# Altium PCB PT100.PcbDoc
Units mm, origin at the board's own origin, x right, y up, seen from the top; angles counter-clockwise.
Board outline 60 x 39 mm, 2 copper layers (Top Layer, Bottom Layer), stack 1.595 mm thick; 73 components, 43 nets, 258 pads, 51 vias.
Unrouted connection lines stored in the file: 1.
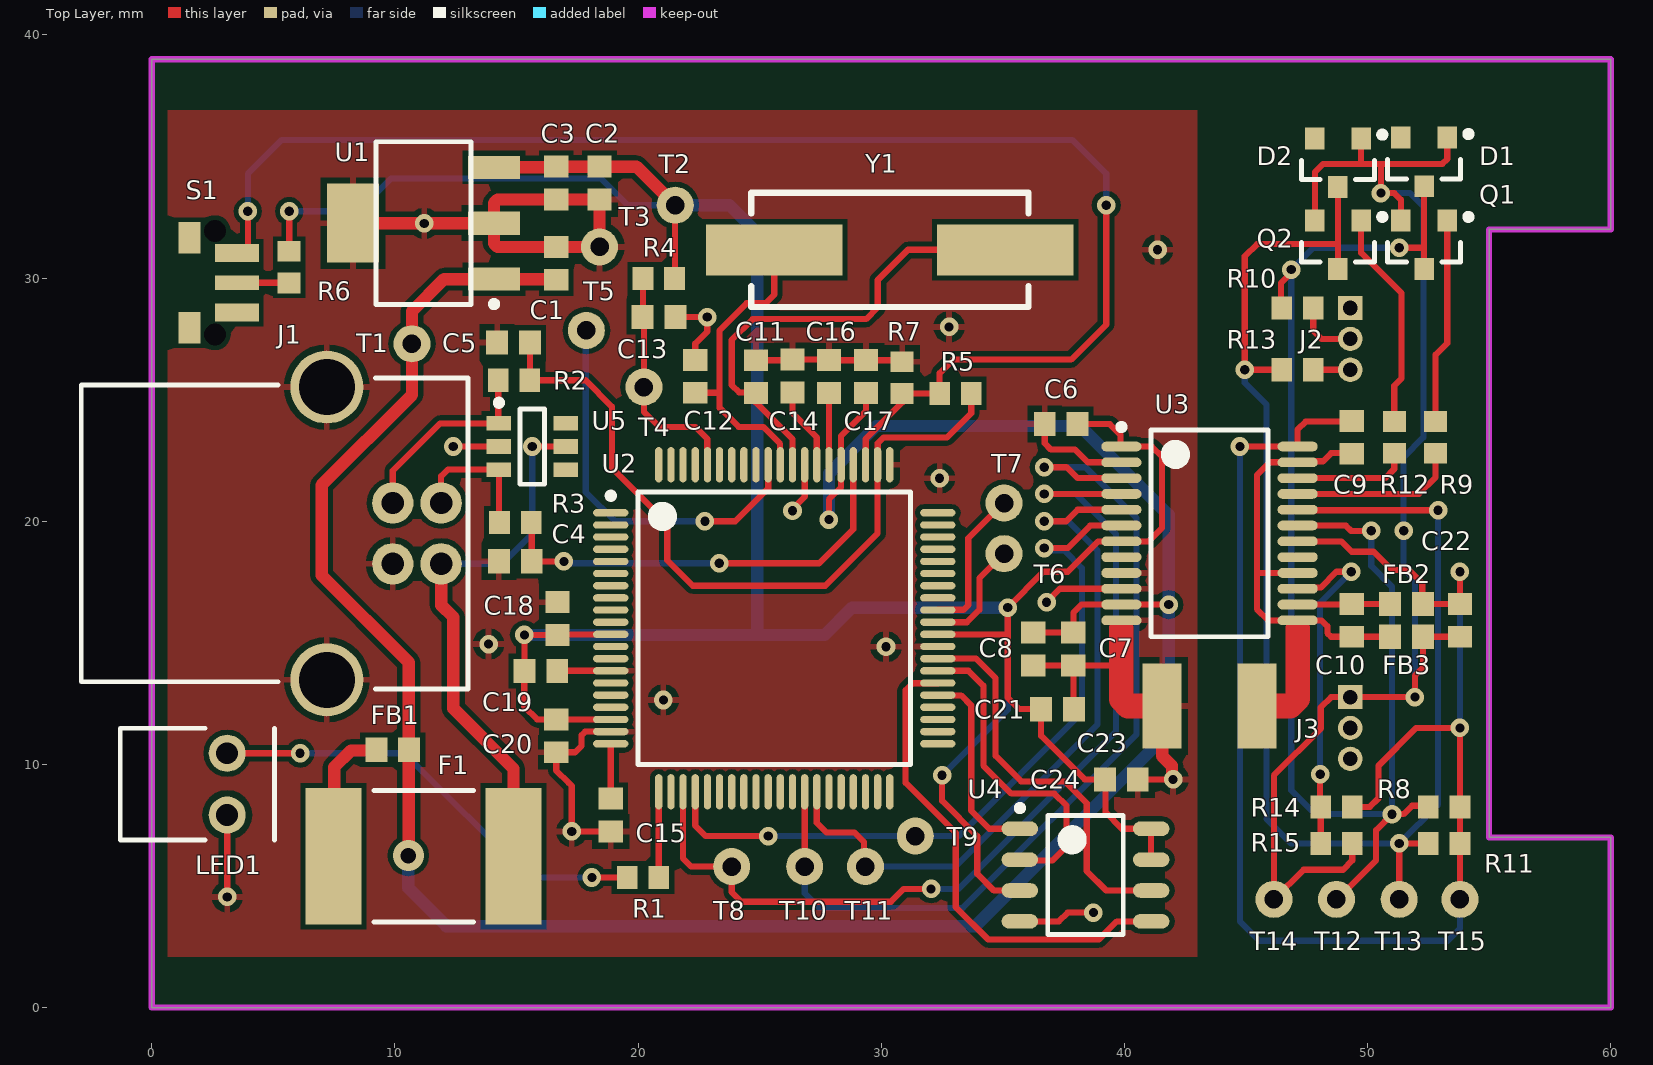
[diagram p0: Top Layer view]
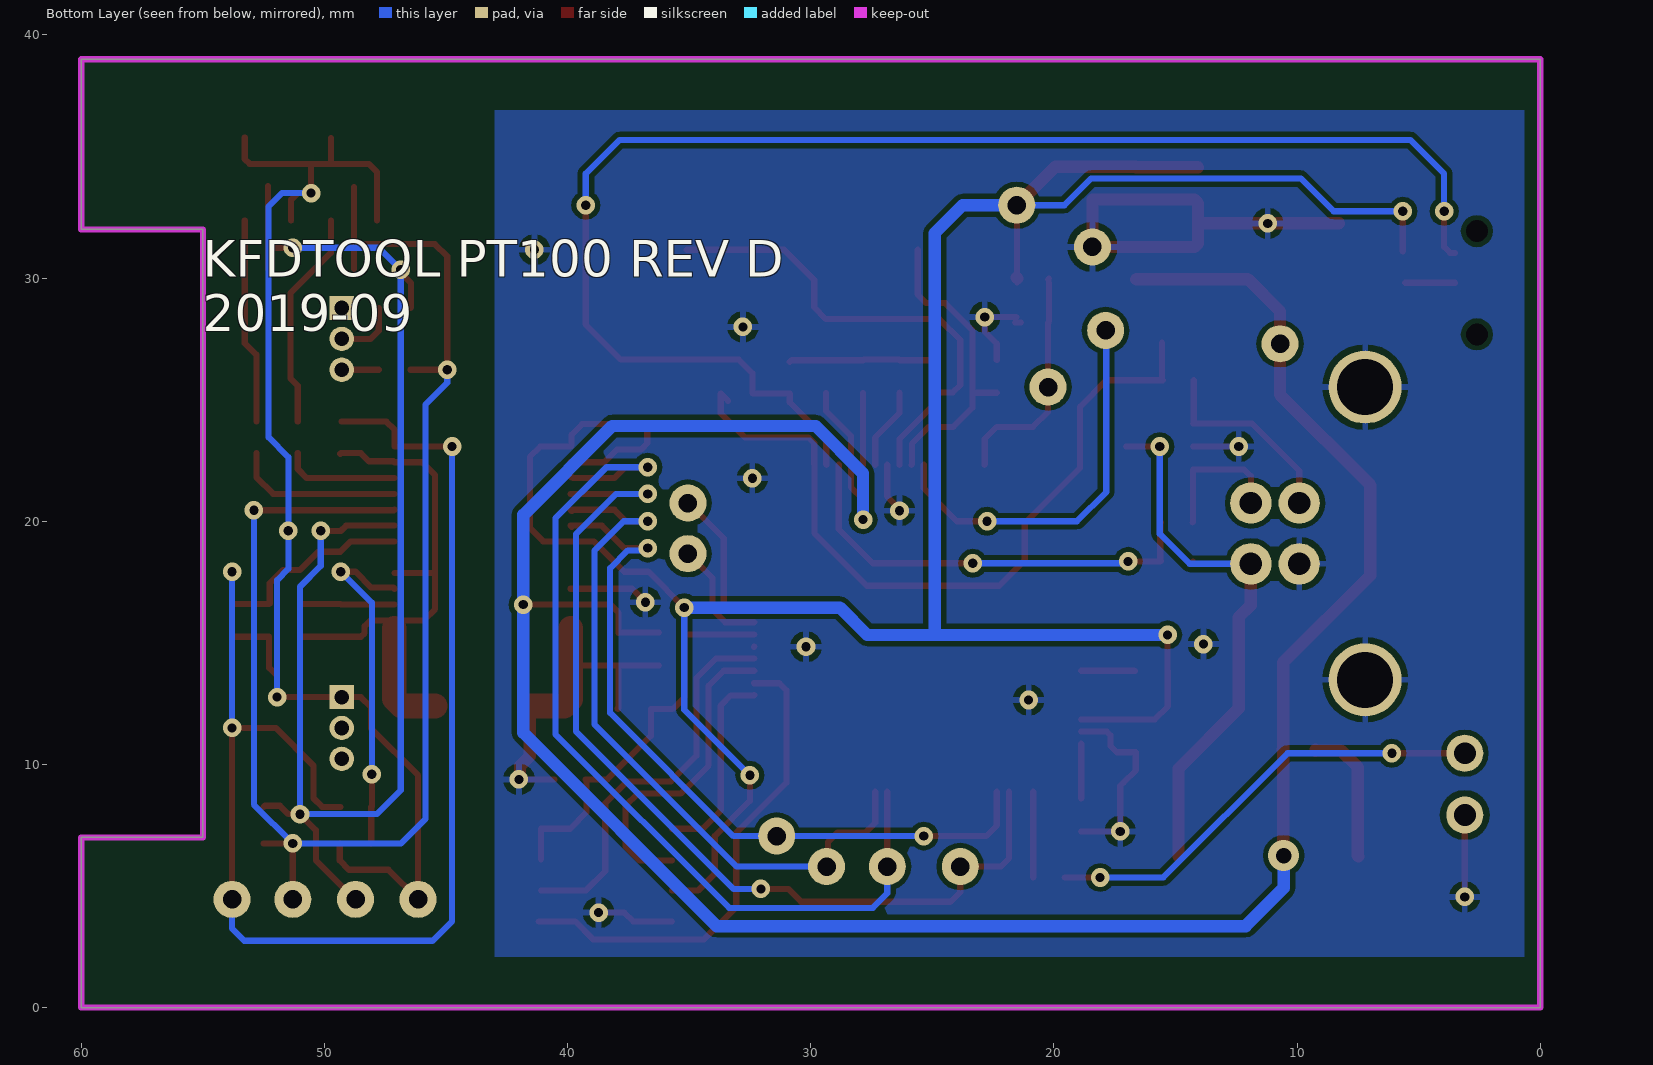
[diagram p1: Bottom Layer view, seen from below]
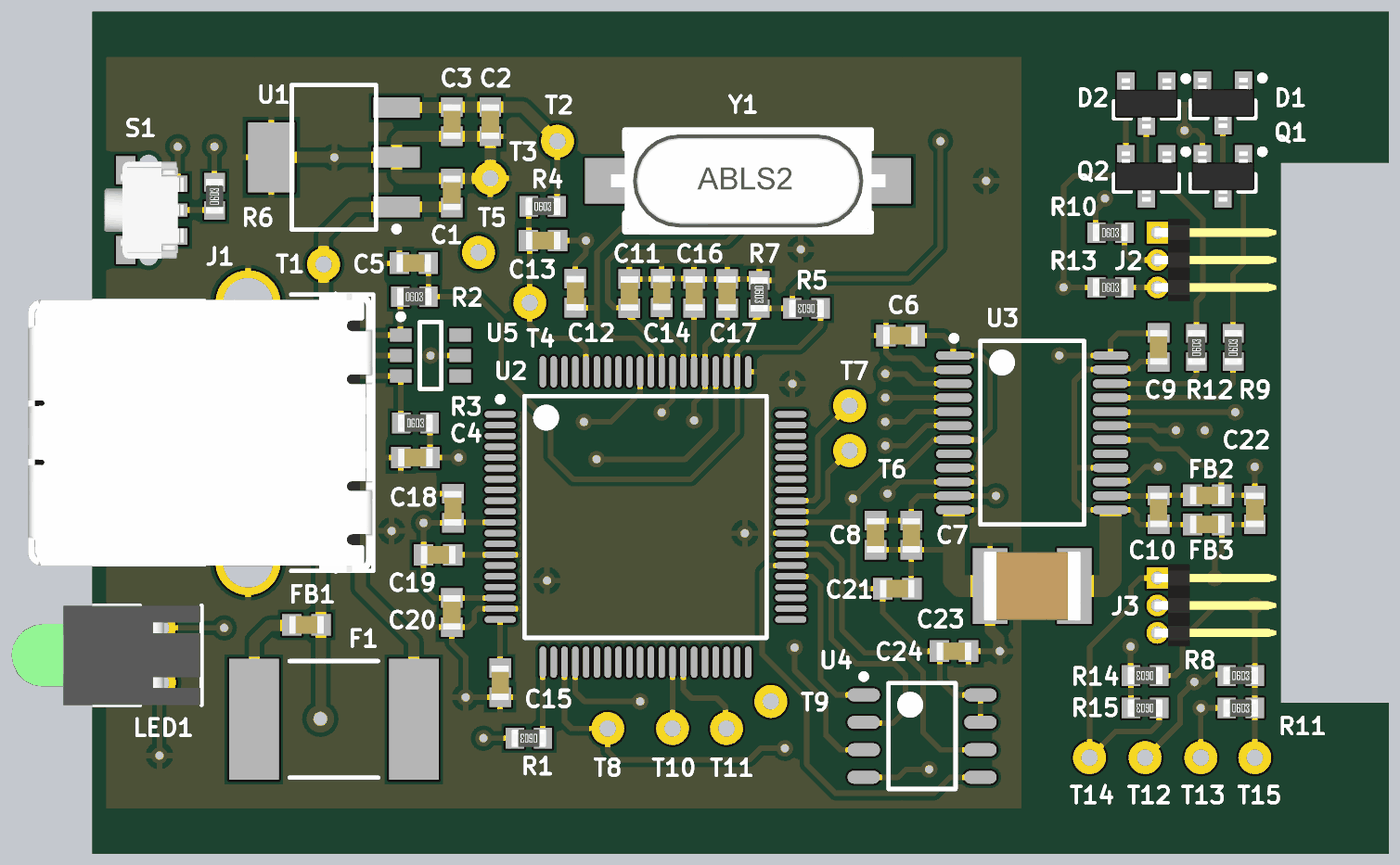
[diagram p2: 3D render of the assembled board from above, using the file's embedded part models]

## Layer stack, top to bottom
Top Solder: solder mask 0.0254, SM-001, Dk 4
Top Layer: signal copper 0.0356
Dielectric 1: core 1.524, Core-043, Dk 4.3
Bottom Layer: signal copper 0.0356
Bottom Solder: solder mask 0.0254, SM-001, Dk 4

## Board outline
0,0 0,39 60,39 60,32 55,32 55,7 60,7 60,0

## Design rules (kind name [scope] priority, off if disabled: settings)
Clearance Clearance_2 [InNamedPolygon('Bottom Layer-GND') vs OnLayer('Keep-Out Layer')] p1: gap=0.508 ignorepadtopadclearanceinfootprint=FALSE
Clearance Clearance_1 [InNamedPolygon('Top Layer-GND') vs OnLayer('Keep-Out Layer')] p2: gap=0.508 ignorepadtopadclearanceinfootprint=FALSE
Clearance [All] p3: gap=0.203 ignorepadtopadclearanceinfootprint=TRUE
HoleSize [All] p1: absolutevalues=TRUE maxlimit=2.54 minlimit=0.254 maxpercent=80.000 minpercent=20.000
MinimumAnnularRing [All] p1: minimumring=0.127
PolygonConnect PolygonConnect_1 [(InNet('GND') AND InComponent('LED1'))] p1: connectstyle=NoConnect reliefconductorwidth=0.254 reliefentries=4 polygonreliefangle="90 Angle" airgapwidth=0.254
PolygonConnect [All] p2: connectstyle=Relief reliefconductorwidth=0.254 reliefentries=4 polygonreliefangle="90 Angle" airgapwidth=0.254
RoutingVias [All] p1: holewidth=0.381 width=0.762 viastyle="Through Hole" minholewidth=0.254 minwidth=0.381 maxholewidth=0.711 maxwidth=1.27
SolderMaskExpansion [All] p1: expansion=0.102
Width [All] p1: maxlimit=1.27 minlimit=0.152 preferedwidth=0.254 minimp=50.000000 maximp=50.000000 favimp=50.000000
29 further rules are at their usual default settings.

## Components (designator, comment, footprint, x,y, rotation, side; value= is the part's Value field where it differs from the comment)
C1 "100n" "CAP 0603" 16.637,30.607 r270 top
C2 "10u" "CAP 0603" 18.415,33.909 r90 top
C3 "100n" "CAP 0603" 16.638,33.909 r90 top
C4 "10p" "CAP 0603" 14.95,18.35 r0 top
C5 "10p" "CAP 0603" 14.876,27.356 r0 top
C6 "100n" "CAP 0603" 37.4,24 r0 top
C7 "100n" "CAP 0603" 37.9,14.75 r90 top
C8 "10u" "CAP 0603" 36.25,14.75 r90 top
C9 "100n" "CAP 0603" 49.35,23.452 r90 top
C10 "100n" "CAP 0603" 49.35,15.925 r90 top
C11 "32p" "CAP 0603" 24.85,25.948 r270 top value=0.1uF
C12 "32p" "CAP 0603" 22.35,25.963 r270 top value=0.1uF
C13 "1n" "CAP 0603" 20.86,28.4 r180 top
C14 "220n" "CAP 0603" 26.35,25.973 r270 top
C15 "470n" "CAP 0603" 18.875,7.92 r90 top
C16 "220n" "CAP 0603" 27.85,25.95 r270 top
C17 "4u7" "CAP 0603" 29.376,25.95 r270 top
C18 "100n" "CAP 0603" 16.684,16 r270 top
C19 "10u" "CAP 0603" 16.002,13.843 r180 top
C20 "100n" "CAP 0603" 16.637,11.176 r90 top
C21 "100n" "CAP 0603" 37.25,12.273 r180 top
C22 "10u" "CAP 0603" 53.8,15.925 r90 top
C23 "100p" "CAP 1812" 43.5,12.4 r0 top
C24 "100n" "CAP 0603" 39.875,9.383 r180 top
D1 "5.6V" "ON SEMI SOT-23-3" 52.324,34.777 r270 top
D2 "5.6V" "ON SEMI SOT-23-3" 48.782,34.75 r270 top
F1 "500mA" "PTC 2920" 11.176,6.223 r180 top
FB1 "Ferrite Chip" "CAP 0603" 9.91,10.6 r0 top
FB2 "Ferrite Chip" "CAP 0603" 51.6,16.6 r0 top
FB3 "Ferrite Chip" "CAP 0603" 51.6,15.25 r0 top
J1 "USB 2.0 B" "FCI 61729-1011BLF" 7.2,19.5 r270 top locked
J2 "M50-3930342" "HWN M50-3930342" 49.29,27.5 r90 top locked
J3 "M50-3930342" "HWN M50-3930342" 49.29,11.5 r90 top locked
LED1 "GRN" "KBRT WP934CB/GD" 3.1,9.19 r270 top locked
Q1 "NPN Transistor" "ON SEMI SOT-23-3" 52.324,31.369 r270 top
Q2 "NPN Transistor" "ON SEMI SOT-23-3" 48.782,31.369 r270 top
R1 "470R" "RES 0603" 20.2,5.35 r180 top
R2 "27R" "RES 0603" 14.9,25.8 r0 top
R3 "27R" "RES 0603" 14.95,19.95 r0 top
R4 "47K" "RES 0603" 20.85,29.985 r0 top
R5 "1K4" "RES 0603" 33.05,25.258 r180 top
R6 "100R" "RES 0603" 5.65,30.45 r90 top
R7 "1M" "RES 0603" 30.861,25.908 r270 top
R8 "10K" "RES 0603" 53.15,8.25 r0 top
R9 "1K" "RES 0603" 52.8,23.452 r90 top
R10 "150R" "RES 0603" 47.117,28.77 r0 top
R11 "10K" "RES 0603" 53.15,6.75 r0 top
R12 "1K" "RES 0603" 51.1,23.452 r90 top
R13 "150R" "RES 0603" 47.117,26.23 r0 top
R14 "30K" "RES 0603" 48.722,8.25 r180 top
R15 "10K" "RES 0603" 48.722,6.75 r180 top
S1 "SPST" "ESWI TL3340AF160QG" 2.6,29.81 r270 top locked
T1 "Test Point" "TEST POINT" 10.7,27.3 r0 top
T2 "Test Point" "TEST POINT" 21.526,33 r0 top
T3 "Test Point" "TEST POINT" 18.415,31.283 r0 top
T4 "Test Point" "TEST POINT" 20.241,25.52 r0 top
T5 "Test Point" "TEST POINT" 17.872,27.85 r0 top
T6 "Test Point" "TEST POINT" 35.05,18.669 r0 top
T7 "Test Point" "TEST POINT" 35.05,20.75 r0 top
T8 "Test Point" "TEST POINT" 23.85,5.8 r0 top
T9 "Test Point" "TEST POINT" 31.4,7.055 r0 top
T10 "Test Point" "TEST POINT" 26.85,5.8 r90 top
T11 "Test Point" "TEST POINT" 29.35,5.8 r0 top
T12 "Test Point" "TEST POINT" 48.722,4.45 r90 top
T13 "Test Point" "TEST POINT" 51.3,4.45 r90 top
T14 "Test Point" "TEST POINT" 46.15,4.45 r90 top
T15 "Test Point" "TEST POINT" 53.8,4.45 r90 top
U1 "LM2937" "TI LM2937IMP-3.3/NOPB" 11.176,32.258 r180 top
U2 "MSP430F5529" "TI MSP430F5529IPNR" 25.6,15.6 r0 top
U3 "ADuM5412" "AD RS-24" 43.5,19.5 r0 top
U4 "AT25M01" "ATML 8S1" 38.4,5.45 r0 top
U5 "USBLC6-2" "ST SOT23-6L" 15.65,23.075 r0 top
Y1 "24MHz" "ABRA ABLS2" 30.35,31.164 r0 top

## Footprints (in the part's own frame and the unit in brackets; to place one, negate y for a bottom-side part, rotate by r counter-clockwise, add the part's x,y. Pads: shape width x height; smd on the part's side, far side on the other; paste and mask are expansions set on the pad)
"ABRA ABLS2" [mm]
  rect 5.6x2.1 smd: 1(-4.75,0) 2(4.75,0)
  silkscreen extent -5.7,-2.35 5.7,2.35, body extent -6.35,-2.35 6.35,2.35, height 3.26
"AD RS-24" [mm]
  oval 1.65x0.4 smd: 1(-3.625,3.575) 2(-3.625,2.925) 3(-3.625,2.275) 4(-3.625,1.625) 5(-3.625,0.975) 6(-3.625,0.325) 7(-3.625,-0.325) 8(-3.625,-0.975) 9(-3.625,-1.625) 10(-3.625,-2.275) 11(-3.625,-2.925) 12(-3.625,-3.575) 13(3.625,-3.575) 14(3.625,-2.925) 15(3.625,-2.275) 16(3.625,-1.625) 17(3.625,-0.975) 18(3.625,-0.325) 19(3.625,0.325) 20(3.625,0.975) 21(3.625,1.625) 22(3.625,2.275) 23(3.625,2.925) 24(3.625,3.575)
  silkscreen extent -3.75,-4.25 2.4,4.5, body extent -2.8,-4.25 2.8,4.25, height 2
"ATML 8S1" [mm]
  oval 1.5x0.6 smd: 1(-2.7,1.905) 2(-2.7,0.635) 3(-2.7,-0.635) 4(-2.7,-1.905) 5(2.7,-1.905) 6(2.7,-0.635) 7(2.7,0.635) 8(2.7,1.905)
  silkscreen extent -2.82,-2.45 1.55,2.88, body extent -1.95,-2.45 1.95,2.45, height 1.75
"CAP 0603" [mm]
  rect 0.9x1 smd: 1(-0.675,0) 2(0.675,0)
  body extent -0.8,-0.41 0.8,0.41, height 0.82
"CAP 1812" [mm]
  rect 1.6x3.5 smd: 1(-1.95,0) 2(1.95,0)
  body extent -2.25,-1.6 2.25,1.6, height 1.1
"ESWI TL3340AF160QG" [mm]
  rect 0.75x1.8 smd: 1(-1.225,0.9) 1(1.225,0.9)
  rect 0.6x1.8 smd: 2(0,0.9)
  round 0 hole 0.9 unplated paste+0 mask+0: ""(-2.125,0) ""(2.125,0)
  rect 1.3x0.9 smd: ""(-1.85,-1.05) ""(1.85,-1.05)
  body extent -2.25,-2.05 2.25,1.62, height 3.3
"FCI 61729-1011BLF" [mm]
  round 1.7 hole 0.92: 1(1.25,4.7) 2(-1.25,4.7) 3(-1.25,2.71) 4(1.25,2.71)
  round 3 hole 2.3: S(-6.02,0) S(6.02,0)
  silkscreen extent -6.4,-10.1 6.4,5.8, body extent -6.56,-10.18 6.56,5.76, height 11
"HWN M50-3930342" [mm]
  rect 1x1 hole 0.6: 1(1.27,0)
  round 1 hole 0.6: 2(0,0) 3(-1.27,0)
  body extent -1.9,-5.5 1.9,0.2, height 2.1
"KBRT WP934CB/GD" [mil]
  round 60 hole 35.43: 1(-50,0) 2(50,0)
  silkscreen extent -91,-173 91,77, body extent -91,-269 91,75, height 289
"ON SEMI SOT-23-3" [mm]
  rect 0.9x0.8 smd: 1(-1,0.95) 2(-1,-0.95) 3(1,0)
  silkscreen extent -1.27,-1.5 0.7,1.95, body extent -1.16,-1.45 1.16,1.45, height 1
"PTC 2920" [mm]
  rect 2.3x5.6 smd: 1(-3.7,0) 2(3.7,0)
  silkscreen extent -2.05,-2.7 2.05,2.7, body extent -3.99,-2.72 3.99,2.72, height 1
"RES 0603" [mm]
  rect 0.85x0.95 smd: 1(-0.65,0) 2(0.65,0)
  body extent -0.8,-0.4 0.8,0.4, height 0.45
"ST SOT23-6L" [mm]
  rect 1x0.6 smd: 1(-1.375,0.95) 2(-1.375,0) 3(-1.375,-0.95) 4(1.375,-0.95) 5(1.375,0) 6(1.375,0.95)
  silkscreen extent -1.5,-1.55 0.5,1.92, body extent -0.88,-1.52 0.87,1.53, height 1.45
"TEST POINT" [mil]
  round 60 hole 30: 1(0,0)
"TI LM2937IMP-3.3/NOPB" [mm]
  rect 2.15x0.95 smd: 1(-2.9,2.3) 2(-2.9,0) 3(-2.9,-2.3)
  rect 2.15x3.25 smd: 4(2.9,0)
  silkscreen extent -3.03,-3.35 1.95,3.45, body extent -1.85,-3.35 1.85,3.35, height 1.8
"TI MSP430F5529IPNR" [mm]
  oval 1.45x0.3 smd: 1(-6.725,4.75) 2(-6.725,4.25) 3(-6.725,3.75) 4(-6.725,3.25) 5(-6.725,2.75) 6(-6.725,2.25) 7(-6.725,1.75) 8(-6.725,1.25) 9(-6.725,0.75) 10(-6.725,0.25) 11(-6.725,-0.25) 12(-6.725,-0.75) 13(-6.725,-1.25) 14(-6.725,-1.75) 15(-6.725,-2.25) 16(-6.725,-2.75) 17(-6.725,-3.25) 18(-6.725,-3.75) 19(-6.725,-4.25) 20(-6.725,-4.75) 41(6.725,-4.75) 42(6.725,-4.25) 43(6.725,-3.75) 44(6.725,-3.25) 45(6.725,-2.75) 46(6.725,-2.25) 47(6.725,-1.75) 48(6.725,-1.25) 49(6.725,-0.75) 50(6.725,-0.25) 51(6.725,0.25) 52(6.725,0.75) 53(6.725,1.25) 54(6.725,1.75) 55(6.725,2.25) 56(6.725,2.75) 57(6.725,3.25) 58(6.725,3.75) 59(6.725,4.25) 60(6.725,4.75)
  oval 0.3x1.45 smd: 21(-4.75,-6.725) 22(-4.25,-6.725) 23(-3.75,-6.725) 24(-3.25,-6.725) 25(-2.75,-6.725) 26(-2.25,-6.725) 27(-1.75,-6.725) 28(-1.25,-6.725) 29(-0.75,-6.725) 30(-0.25,-6.725) 31(0.25,-6.725) 32(0.75,-6.725) 33(1.25,-6.725) 34(1.75,-6.725) 35(2.25,-6.725) 36(2.75,-6.725) 37(3.25,-6.725) 38(3.75,-6.725) 39(4.25,-6.725) 40(4.75,-6.725) 61(4.75,6.725) 62(4.25,6.725) 63(3.75,6.725) 64(3.25,6.725) 65(2.75,6.725) 66(2.25,6.725) 67(1.75,6.725) 68(1.25,6.725) 69(0.75,6.725) 70(0.25,6.725) 71(-0.25,6.725) 72(-0.75,6.725) 73(-1.25,6.725) 74(-1.75,6.725) 75(-2.25,6.725) 76(-2.75,6.725) 77(-3.25,6.725) 78(-3.75,6.725) 79(-4.25,6.725) 80(-4.75,6.725)
  silkscreen extent -6.85,-5.6 5.6,5.6, body extent -6,-6 6,6, height 1.6

## Part data
C1 C2 C3 C4 C5 C6 C7 C8 C9 C10 C11 C12 C13 C14 C15 C16 C17 C18 C19 C20 C21 C22 C23 C24: library part Capacitor
D1 D2: library part "Zener Diode"
F1: library part PTC
J1: library part "FCI 61729-1011BLF"
J2 J3: library part "HWN M50-3930342"
LED1: library part LED
R1 R2 R3 R4 R5 R6 R7 R8 R9 R10 R11 R12 R13 R14 R15: library part Resistor
S1: library part "SPST Switch"
U1: library part "TI LM2937"
U2: library part "TI MSP430F5529"
U3: library part "AD ADuM5412"
U4: library part "ATML AT25M01"
U5: library part "ST USBLC6-2"
Y1: library part Crystal

## Via types
v1: diameter 0.762, hole 0.381, Top Layer to Bottom Layer, tented both sides, 50 vias
v2: diameter 1.27, hole 0.635, Top Layer to Bottom Layer, tented both sides, 1 vias

## Nets (pads, with @x,y where several pads share a name; then routed paths per layer and width w, separated by ;. In a path a pad name is that pad's centre, name@x,y a point inside that pad or via, vN(x,y) a via of type N, cw(c..) or ccw(c..) an arc to the next point about the centre after c; other vN are vias at no path point)
3V3: C2.2 C3.2 C6.2 C18.2 C19.2 C20.2 C21.2 C24.2 R4.2 R6.2 T2.1 U1.3 U2.11 U2.18 U2.50 U3.1 U3.7 U4.3 U4.7 U4.8 | length 127.9
  Top Layer w0.254: R6.2 v1(5.65,32.75) ; C3.2@16.612,34.558 C3.2 ; U2.18 16.638,11.85 C20.2 15.85,11.851 15.32,12.381 15.32,13.85 C19.2 v1(15.327,15.325) C18.2 16.709,15.35 U2.11 ; R4.2@21.513,29.823 21.513,29.998 T2.1@21.513,33 ; U2.50 35.2,15.35 ; v1(32.5,9.55) 32.5,8.505 33.95,7.055 33.95,5.5 34.635,4.815 U4.3 U4.3@35.634,4.881 ; C21.2@36.575,12.192 36.575,11.175 38.367,9.383 C24.2 C24.2@39.225,9.383 ; C21.2 35.679,12.273 35.2,12.752 35.2,15.35 ; C6.2 39.399,24 39.837,23.561 39.837,23.112 U3.1 41.125,23.075 41.55,22.65 41.55,19.725 41,19.175 U3.7 38.925,19.175 37.672,17.922 36.672,17.922 v1(35.2,16.45) 35.2,15.35 ; C24.2@39.25,9.383 C24.2@39.225,9.383 ; U4.7 U4.8 39.894,7.355 39.225,8.024 C24.2@39.225,9.383
  Top Layer w0.508: U1.3 C3.2@16.612,34.558 ; C3.2 C2.2 19.929,34.584 T2.1@21.513,33 ; R4.2 21.513,29.998 R4.2@21.526,30.011
  Bottom Layer w0.254: v1(5.65,32.75) 8.5,32.75 9.85,34.1 18.465,34.1 19.565,33 T2.1 ; v1(32.5,9.55) 35.2,12.25 v1(35.2,16.45)
  Bottom Layer w0.508: v1(15.327,15.325) 27.675,15.325 28.8,16.45 v1(35.2,16.45) ; T2.1 23.75,33 24.9,31.85 24.9,15.35
5V: C1.2 C7.2 C8.2 C17.2 FB1.2 T1.1 U1.1 U2.65 U3.11 | length 108
  Top Layer w0.254: C1.2@16.611,29.958 C1.2 ; v1(27.85,20.069) 27.85,20.898 28.35,21.398 U2.65 28.35,23.511 29.376,24.537 C17.2 ; C8.2 37.882,15.425 37.9,15.407 C7.2 37.9,16.24 38.235,16.575 U3.11 v1@41.752,16.575
  Top Layer w0.508: v2(10.55,6.25) 10.567,6.268 10.567,10.582 FB1.2@10.57,10.585 ; FB1.2 FB1.2@10.57,10.585 ; 10.7,28.5 T1.1 10.7,25.199 6.985,21.484 6.985,17.78 10.57,14.195 FB1.2@10.57,10.585 ; 10.7,28.636 12.021,29.958 U1.1 C1.2@16.611,29.958 ; T1.1@11.1,27.224 T1.1@11.176,27.3 ; v1(27.85,20.069) v1@27.899,20.117
  Bottom Layer w0.508: v2(10.55,6.25) 10.55,4.917 12.117,3.35 33.869,3.35 41.821,11.302 v1(41.821,16.575) 41.821,20.266 38.169,23.917 29.796,23.917 27.85,21.971 v1(27.85,20.069)
5VISO: C9.2 C22.2 FB2.2 R8.2 R11.2 R14.1 T15.1 U3.18 U3.24 | length 65.6
  Top Layer w0.254: v1(44.75,23.075) U3.24 47.125,23.775 47.452,24.102 C9.2@49.29,24.102 ; U3.18 48.925,19.175 49.35,18.75 50.25,18.75 51,18 51.7,18 52.25,17.45 52.25,16.625 FB2.2 C22.2 v1(53.8,17.922) ; R14.1@49.35,8.25 R14.1 50.1,8.25 50.45,8.6 50.45,9.955 51.995,11.5 v1(53.8,11.5) R8.2 R11.2 T15.1
  Bottom Layer w0.254: v1(44.75,23.075) 44.75,3.55 45.55,2.75 53.3,2.75 53.8,3.25 T15.1 T15.1@53.8,4.735 ; v1(53.8,11.5) v1(53.8,17.922)
CONN_USB_DM: J1.2 R3.1 U5.3 | length 5.8
  Top Layer w0.254: J1.2 11.9,21.85 12.175,22.125 U5.3 14.275,19.975 R3.1
CONN_USB_DP: J1.3 R2.1 U5.1 | length 8.3
  Top Layer w0.254: J1.3 9.91,22.075 11.86,24.025 U5.1 14.25,24.05 R2.1
EEPROM_CS: U2.45 U4.1 | length 8.2
  Top Layer w0.254: U2.45 32.334,12.841 33.283,12.841 33.7,12.424 33.7,8.1 34.445,7.355 U4.1
EEPROM_MISO: U2.47 U4.2 | length 13.4
  Top Layer w0.254: U2.47 33.585,13.85 34.2,13.235 34.2,9.95 35.35,8.8 37.122,8.8 37.625,8.297 37.625,6.632 37.045,6.052 U4.2@35.7,6.052
EEPROM_MOSI: U2.46 U4.5 | length 20.2
  Top Layer w0.254: U2.46@32.334,13.341 U2.46 32.316,13.341 31.291,13.341 31,13.05 31,9.25 33.066,7.184 33.066,4.134 34.4,2.8 38.95,2.8 39.695,3.545 U4.5 U4.5@41.2,3.545
EEPROM_SCK: U2.48 U4.6 | length 16.2
  Top Layer w0.254: U2.48 33.9,14.35 34.7,13.55 34.7,10.35 35.75,9.3 37.55,9.3 38.45,8.4 38.45,5.615 39.25,4.815 U4.6
GND: C1.1 C2.1 C3.1 C4.1 C5.1 C6.1 C7.1 C8.1 C11.1 C12.1 C13.1 C14.1 C15.1 C16.1 C17.1 C18.1 C19.1 C20.1 C21.1 C23.1 C24.1 J1.4 J1.S LED1.2 R7.1 T3.1 U1.2 U1.4 U2.14 U2.19 U2.49 U2.61 U2.68 U3.2 U3.9 U3.10 U3.12 U4.4 U5.2 | length 71
  Top Layer w0.254: LED1.2@3.089,7.909 LED1.2 v1(3.1,4.55) ; v1(12.4,23.075) U5.2 ; C19.1 16.684,13.85 U2.14 ; C15.1 v1(17.272,7.245) 17.272,9.113 17.145,9.24 16.637,9.748 C20.1 17.411,10.501 17.675,10.765 17.675,11.201 17.824,11.35 U2.19 ; C13.1@21.35,28.173 C13.1@21.591,28.173 ; C13.1 v1(22.841,28.4) 22.841,27.801 22.35,27.31 C12.1 ; C11.1 26.325,26.623 C14.1 27.827,26.648 C16.1 C17.1 30.794,26.625 R7.1 ; v1(26.35,20.438) 26.35,20.516 26.85,21.016 U2.68 ; U2.49 U2.49@32.334,14.841 ; U4.4 37.304,3.545 37.667,3.908 v1(38.728,3.908) ; C8.1 C7.1 ; C6.1 36.725,23.206 36.981,22.95 37.972,22.95 38.497,22.425 U3.2 ; v1(36.8,16.675) 37.35,17.225 U3.10 ; C21.1@37.95,12.298 C21.1 37.9,12.298 C7.1 ; 39.875,14.138 39.813,14.075 C7.1 ; C24.1 v1(42,9.383) v1@41.955,9.428
  Top Layer w0.508: U1.4 U1.2 ; C1.1 14.225,31.282 14.076,31.431 U1.2 ; C1.1 T3.1 C2.1 C3.1 14.225,33.234 14.076,33.085 U1.2 ; C23.1 41.55,10.346 41.955,9.941 v1@41.955,9.428
  Top Layer w1.016: 39.875,15.6 39.875,14.138 39.875,12.675 40.15,12.4 C23.1 C23.1@41.525,12.375
  other v1: 21.04,12.65 30.195,14.841 13.85,14.952 32.4,21.767 32.788,27.992 41.363,31.164 11.2,32.25
GNDISO: C22.1 D1.1 D2.1 FB3.2 J3.1 Q1.2 Q2.2 R15.1 T14.1 | length 56.5
  Top Layer w0.254: T14.1 47.371,5.671 48.991,5.671 49.372,6.052 R15.1 ; T14.1@46.15,4.7 46.15,9.55 48.072,11.472 48.072,12.343 48.499,12.77 J3.1 v1(51.95,12.77) 51.95,13.65 52.275,13.975 FB3.2 C22.1 ; Q2.2 47.832,34.363 48.169,34.7 49.732,34.7 ; D2.1 49.732,34.7 ; Q1.2 51.374,33.226 51.1,33.5 v1(50.55,33.5) 50.55,34.7 ; D1.1 53.274,34.898 53.076,34.7 50.55,34.7 ; 49.732,34.7 50.55,34.7
  Bottom Layer w0.254: v1(50.55,33.5) 51.75,33.5 52.3,32.95 52.3,23.451 51.484,22.635 v1(51.484,19.612) 51.484,18.038 51.95,17.572 v1(51.95,12.77)
GPIO1: T6.1 U2.51 | length 4.6
  Top Layer w0.254: U2.51 33.524,15.85 34.035,16.361 34.035,17.654 T6.1
GPIO2: T7.1 U2.52 | length 6.2
  Top Layer w0.254: U2.52 32.334,16.359 33.386,16.359 33.578,16.551 33.578,19.303 T7.1@35.05,20.775
KFD_DATA: J2.2 R10.2 | length 2.6
  Top Layer w0.254: R10.2 47.767,27.838 48.105,27.5 J2.2
KFD_DATA_IN: D1.3 Q1.3 R8.1 R10.1 T12.1 U3.19 | length 58.1
  Top Layer w0.254: R10.1 46.436,28.801 46.436,29.789 46.863,30.216 v1(46.863,30.354) ; U3.19 49.1,19.825 49.325,19.6 v1@50.15,19.6 ; T12.1@48.722,4.7 49,4.7 50.35,6.05 50.35,7.3 v1(51.005,7.955) 51.484,7.955 51.829,8.3 52.45,8.3 R8.1 ; v1(51.3,31.25) 52.324,31.25 ; Q1.3 52.324,31.25 ; D1.3 52.324,31.25
  Bottom Layer w0.254: v1@50.15,19.6 50.15,18.162 51.005,17.307 v1(51.005,7.955) 47.845,7.955 46.863,8.937 v1(46.863,30.354) 47.759,31.25 v1(51.3,31.25)
  other v1: 50.15,19.612
KFD_DATA_OUT: R9.1 U3.21 | length 6.9
  Top Layer w0.254: U3.21 52.112,21.125 52.8,21.812 R9.1
KFD_SENSE: J2.3 R13.2 | length 1.5
  Top Layer w0.254: R13.2 J2.3
KFD_SENSE_IN: D2.3 Q2.3 R11.1 R13.1 T13.1 U3.20 | length 62
  Top Layer w0.254: R13.1 v1(44.95,26.23) 44.95,30.897 45.455,31.402 48.782,31.402 ; U3.20 47.15,20.45 v1(52.9,20.45) ; Q2.3 48.782,31.402 ; D2.3 48.782,31.402 ; T13.1@51.3,4.7 v1(51.3,6.75) R11.1
  Bottom Layer w0.254: v1(44.95,26.23) 44.95,25.7 45.15,25.5 45.85,24.8 45.85,7.75 46.85,6.75 v1(51.3,6.75) 52.9,8.35 v1(52.9,20.45) ; T13.1 T13.1@51.3,4.725
KFD_SENSE_OUT: R12.1 U3.22 | length 4.8
  Top Layer w0.254: U3.22 50.725,21.775 51.1,22.15 R12.1
LED1: R1.1 U2.21 | length 3.5
  Top Layer w0.254: R1.1 U2.21
MCU_DATA_IN_3V3: T9.1 U2.24 U3.6 | length 31
  Top Layer w0.254: U2.24 22.35,7.487 22.782,7.055 v1(25.35,7.055) ; v1(36.7,18.9) 37.671,18.9 38.596,19.825 U3.6 U3.6@39.828,19.778
  Bottom Layer w0.254: v1(25.35,7.055) T9.1 33.18,7.055 38.25,12.125 38.25,18.075 37.522,18.803 36.797,18.803 v1(36.7,18.9)
MCU_DATA_OUT_3V3: T8.1 U2.23 U3.4 | length 39.7
  Top Layer w0.254: U2.23 21.85,6.129 22.179,5.8 T8.1 23.85,4.75 24.25,4.35 30.396,4.35 30.927,4.881 v1(32.05,4.881) ; v1(36.7,21.125) U3.4
  Bottom Layer w0.254: v1(32.05,4.881) 33.181,4.881 39.65,11.35 39.65,19.478 38.003,21.125 v1(36.7,21.125)
MCU_SENSE_IN_3V3: T11.1 U2.34 U3.5 | length 29.8
  Top Layer w0.254: U2.34 27.35,7.6 27.75,7.2 28.9,7.2 29.296,6.804 T11.1@29.296,5.8 ; v1(36.7,20) 37.6,20 38.075,20.475 39.781,20.475 39.828,20.428 U3.5
  Bottom Layer w0.254: T11.1@29.359,5.8 33.045,5.8 38.9,11.655 38.9,18.789 37.689,20 v1(36.7,20)
MCU_SENSE_OUT_3V3: T10.1 U2.33 U3.3 | length 37.9
  Top Layer w0.254: T10.1@26.85,5.754 T10.1 U2.33 ; v1(36.7,22.225) 37.625,22.225 38.075,21.775 39.781,21.775 39.828,21.822 U3.3@39.837,21.812
  Bottom Layer w0.254: T10.1@26.85,5.754 26.85,4.7 27.45,4.1 33.358,4.1 40.5,11.242 40.5,20.125 38.4,22.225 v1(36.7,22.225)
MCU_USB_DM: C4.2 R3.2 U2.64 | length 18.1
  Top Layer w0.254: C4.2@15.6,18.375 C4.2 ; R3.2 15.625,19.925 C4.2 ; v1(16.95,18.35) C4.2 ; v1(23.335,18.271) 27.446,18.271 28.85,19.675 U2.64
  Bottom Layer w0.254: v1(16.95,18.35) 17.029,18.271 v1(23.335,18.271)
MCU_USB_DP: C5.2 R2.2 R5.1 U2.62 | length 31.9
  Top Layer w0.254: R2.2@15.524,25.8 15.551,25.827 C5.2 ; R2.2 17.84,25.8 18.922,24.718 18.922,22.2 21.2,19.922 21.2,18.4 22.25,17.35 27.7,17.35 29.85,19.5 U2.62 29.859,22.334 29.859,23.212 30.099,23.452 32.707,23.452 33.7,24.445 R5.1 R5.1@33.402,24.96
NetC9_1: C9.1 C10.1 C23.2 FB3.1 U3.13 U3.16 U3.23 | length 22.4
  Top Layer w0.254: 47.125,15.6 46.8,15.925 45.913,15.925 45.45,16.388 45.45,17.85 ; U3.13 48.105,15.925 48.35,15.68 48.35,15.399 48.499,15.25 C10.1 FB3.1 ; U3.16 45.475,17.875 45.45,17.85 ; C9.1 49.325,22.802 48.499,22.802 48.169,22.472 47.172,22.472 U3.23 45.975,22.425 45.45,21.9 45.45,17.85
  Top Layer w1.016: C23.2 46.825,12.4 47.125,12.7 47.125,15.6
NetC10_2: C10.2 FB2.1 U3.14 | length 3.8
  Top Layer w0.254: U3.14 49.325,16.575 C10.2 FB2.1
NetC11_2: C11.2 U2.69 Y1.2 | length 20
  Top Layer w0.254: C11.2 C11.2@24.837,25.285 ; U2.69 26.35,23.375 24.837,24.888 C11.2@24.837,25.285 ; Y1.2 31.1,31.164 29.859,29.923 29.859,28.801 29.376,28.318 24.708,28.318 23.85,27.46 23.85,25.6 24.152,25.298 24.825,25.298 C11.2@24.837,25.285
NetC12_2: C12.2 U2.70 Y1.1 | length 12.9
  Top Layer w0.254: C12.2 23.335,25.288 23.35,25.273 ; Y1.1 25.6,29.322 25.249,28.971 24.471,28.971 23.35,27.85 23.35,25.273 ; U2.70 25.842,22.333 25.842,23.182 25.145,23.879 24.134,23.879 23.35,24.663 23.35,25.273
NetC14_2: C14.2 U2.67 | length 3.4
  Top Layer w0.254: C14.2 26.35,24.452 27.35,23.452 U2.67
NetC15_2: C15.2 U2.20 | length 2.3
  Top Layer w0.254: C15.2 U2.20
NetC16_2: C16.2 U2.66 | length 2.9
  Top Layer w0.254: U2.66 C16.2
NetF1_2: F1.2 FB1.1 | length 5.7
  Top Layer w0.508: F1.2 7.5,6.247 7.5,9.885 8.19,10.575 FB1.1@9.235,10.575 ; FB1.1@9.235,10.55 FB1.1@9.235,10.575 ; FB1.1 FB1.1@9.235,10.575
NetLED1_1: LED1.1 R1.2 | length 18.6
  Top Layer w0.254: LED1.1 v1(6.097,10.46) ; v1(18.1,5.35) R1.2
  Bottom Layer w0.254: v1(6.097,10.46) 10.39,10.46 15.5,5.35 v1(18.1,5.35)
NetQ1_B: Q1.1 R9.2 | length 8.5
  Top Layer w0.254: R9.2 52.8,26.85 53.274,27.324 Q1.1
NetQ2_B: Q2.1 R12.2 | length 9.1
  Top Layer w0.254: Q2.1 49.732,31.043 51.4,29.375 51.4,25.876 51.1,25.576 R12.2
NetR5_2: R5.2 R7.2 S1.1 U2.63 | length 59.8
  Top Layer w0.254: S1.1@3.5,31.035 3.702,31.035 3.95,31.283 v1(3.95,32.75) ; U2.63 29.359,22.334 29.359,23.388 30.861,24.89 R7.2 R5.2 32.4,26.095 32.953,26.648 37.809,26.648 39.25,28.089 v1(39.25,33)
  Bottom Layer w0.254: v1(3.95,32.75) 3.95,34.3 5.337,35.687 37.863,35.687 39.25,34.3 v1(39.25,33)
NetR6_1: R6.1 S1.2 | length 2
  Top Layer w0.254: S1.2 R6.1@5.55,29.81
NetR14_2: R14.2 R15.2 U3.15 | length 14.1
  Top Layer w0.254: U3.15 47.172,17.272 48.072,17.272 48.722,17.922 v1(49.325,17.922) ; v1(48.05,9.6) 48.05,8.272 R14.2 R15.2
  Bottom Layer w0.254: v1@48.05,9.659 48.05,16.647 v1(49.325,17.922)
SBWTCK: T5.1 U2.71 | length 16.2
  Top Layer w0.254: v1(22.75,20) 23.992,20 25.35,21.358 U2.71
  Bottom Layer w0.254: T5.1@17.85,27.85 17.85,21.2 19.05,20 v1(22.75,20)
SBWTDIO: C13.2 R4.1 T4.1 U2.76 | length 9.5
  Top Layer w0.254: R4.1@20.2,29.81 20.2,28.214 20.241,28.173 T4.1 20.241,24.498 20.86,23.879 22.35,23.879 22.841,23.388 22.841,22.334 U2.76 ; R4.1 R4.1@20.241,29.943
VBUS: F1.1 J1.1 U5.5 | length 22.5
  Top Layer w0.254: v1(15.65,23.075) U5.5
  Top Layer w0.508: J1.1 11.9,16.551 12.4,16.051 12.4,12.3 14.876,9.824 F1.1
  Bottom Layer w0.254: J1.1 14.422,18.25 15.65,19.478 v1(15.65,23.075)
pads on no net: D1.2 D2.2 J2.1 J3.2 J3.3 S1. U2.1 U2.2 U2.3 U2.4 U2.5 U2.6 U2.7 U2.8 U2.9 U2.10 U2.12 U2.13 U2.15 U2.16 U2.17 U2.22 U2.25 U2.26 U2.27 U2.28 U2.29 U2.30 U2.31 U2.32 U2.35 U2.36 U2.37 U2.38 U2.39 U2.40 U2.41 U2.42 U2.43 U2.44 U2.53 U2.54 U2.55 U2.56 U2.57 U2.58 U2.59 U2.60 U2.72 U2.73 U2.74 U2.75 U2.77 U2.78 U2.79 U2.80 U3.8 U3.17 U5.4 U5.6

## Polygon pours and split planes (outlines as drawn)
GND on Top Layer "Top Layer-GND" (solid, pour order 36): 0,36.9 0,2.1 43,2.1 43,36.9
GND on Bottom Layer "Bottom Layer-GND" (solid, pour order 38): 0,36.9 0,2.1 43,2.1 43,36.9

## Keep-outs
Keep-Out Layer:
  the board outline again, w0.254

## Other copper
Top Layer:
  pour cut-out: 52.95,13.4
  region net KFD_DATA_IN: 51.371,32.372

## Silkscreen, mask and mechanical layers (free items; w line width, h text height)
Bottom Overlay:
  text "KFDTOOL PT100 REV D / 2019-09" at 55,27.813 h1.5
Mechanical 15:
  lines w0.254: 0,2 60,2 ; 0,4 60,4 ; 0,5.45 60,5.45 ; 0,19.5 55,19.5 ; 0,33.55 60,33.55 ; 0,35 60,35 ; 0,37 60,37
  lines w1: 43.5,0 43.5,39